# EAGLE board esp07 (EAGLE 7.2.0)

Size 160 x 100 mm. Coordinates in mm from the lower left corner, seen from the top.
Outline: 0,0 160,0 160,100 0,100 0,0
Copper layers (1*16): Top 0.035mm / dielectric 1.5mm / Bottom 0.035mm
Design rules "default": minimum track width 10mil, minimum drill 24mil, track to track 8mil, track to pad 8mil, pad to pad 8mil, via to via 8mil, smd to smd 8mil, copper to edge 40mil, drill to drill 8mil, minimum pad ring 10mil, minimum via ring 8mil, stop-mask expansion 4mil, vias tented up to drill 0mil, thermal gap 10mil

## Footprints (pad centres in the part's own frame; a part is rotated, then mirrored left to right if it is on the bottom)
C0805 = smd 1.3 x 1.5: 1 -0.85,0; 2 0.85,0
USB-MINIB-THM-MOLEX = drill 0.7 offset: D+ 0,9.72; D- -0.8,8.42; GND 1.6,9.72; ID 0.8,8.42; VBUS -1.6,9.72 | drill 2 pad 3.81: GND1 -3.65,4.57; GND4 3.65,4.57
M0805 = smd 1.3 x 1.6: 1 -0.95,0; 2 0.95,0
ESP-12 = smd 2 x 1.2: 1 -7.5,4.5; 2 -7.5,2.5; 3 -7.5,0.5; 4 -7.5,-1.5; 5 -7.5,-3.5; 6 -7.5,-5.5; 7 -7.5,-7.5; 8 -7.5,-9.5; 9 7.5,-9.5; 10 7.5,-7.5; 11 7.5,-5.5; 12 7.5,-3.5; 13 7.5,-1.5; 14 7.5,0.5; 15 7.5,2.5; 16 7.5,4.5

## Placement (x,y rotation side)
C1  104  [C0805]  -16.51,57.15 0 top  (outside the outline)
CN1  [USB-MINIB-THM-MOLEX]  -36.83,29.21 0 top  (outside the outline)
R1  10k  [M0805]  -21.59,57.15 0 top  (outside the outline)
X1  [ESP-12]  -21.59,13.97 0 top  (outside the outline)
X2  [ESP-12]  -21.59,40.64 0 top  (outside the outline)

## Library data of the parts
C1 CN1 R1 X1 X2 = adafruit

## Nets
GND: CN1.GND X1.9 X2.9
VBUS: CN1.VBUS
VCC: X1.8 X2.8

## Tracks (layer width: path | path; a pad name or v marks a point on that pad's centre or on a via)
GND  (2 unrouted)
VCC  (1 unrouted)